# Altium PCB STM32F103C6T7A.PcbDoc
Units mil, origin at the board's own origin, x right, y up, seen from the top; angles counter-clockwise.
Board outline 2111.22 x 899.61 mil, 2 copper layers (Top Layer, Bottom Layer); 30 components, 49 nets, 163 pads, 161 vias.
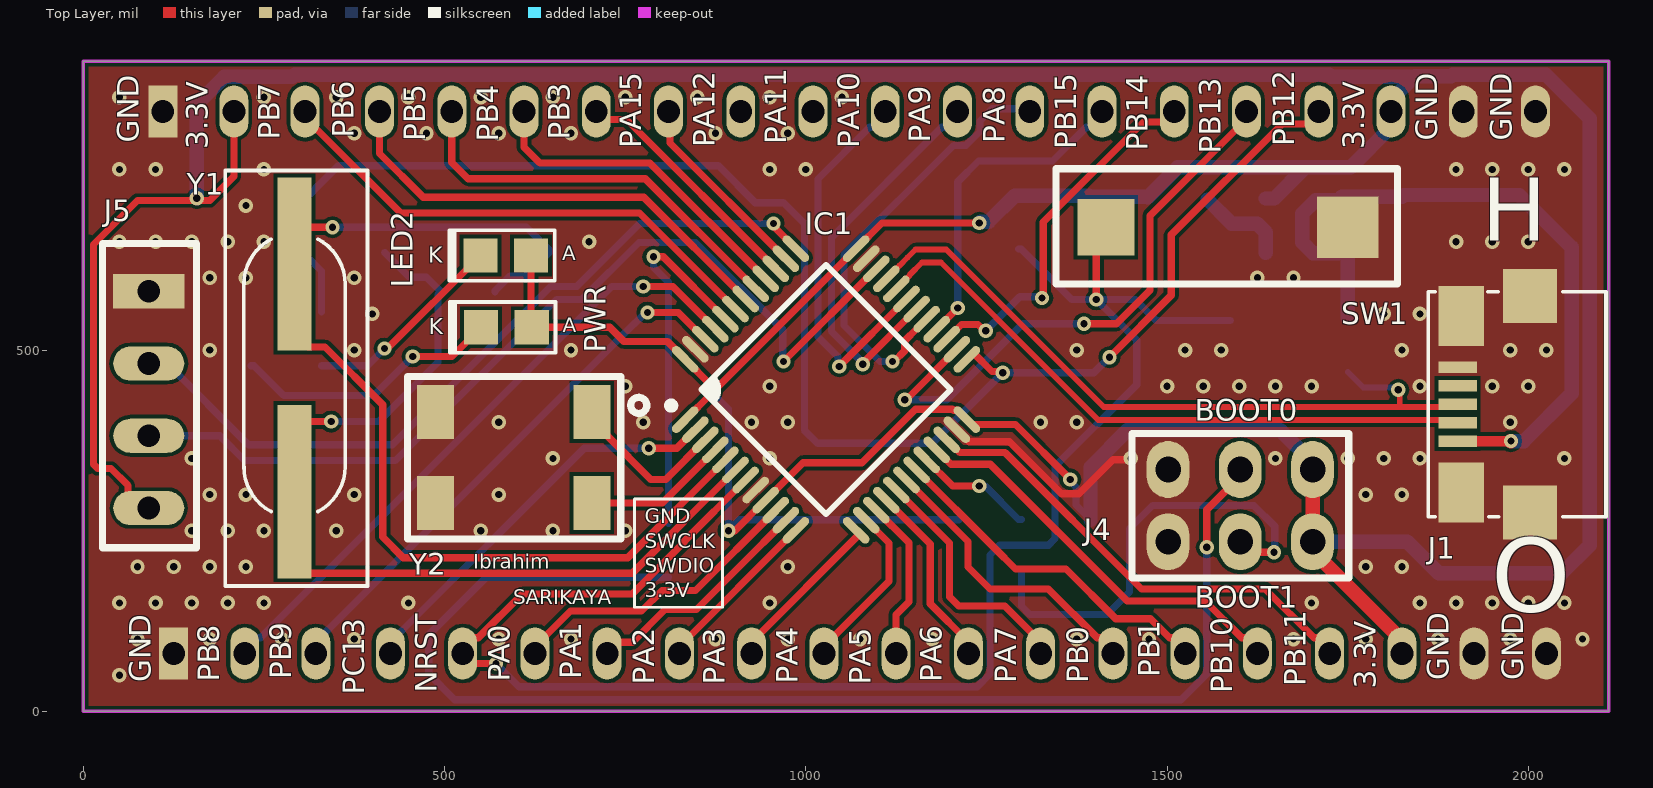
[diagram p0: Top Layer view]
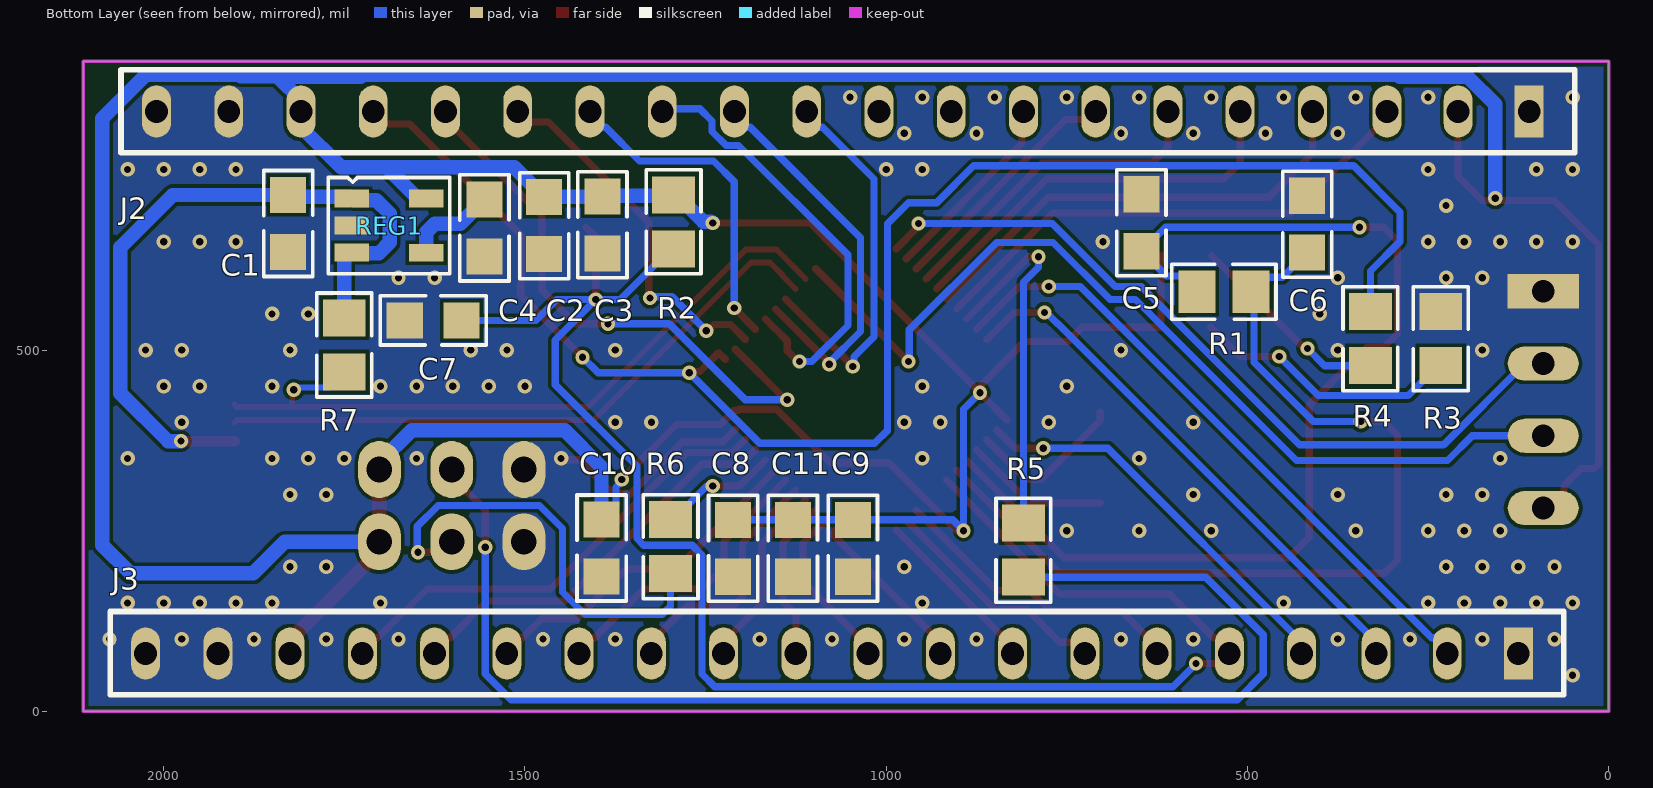
[diagram p1: Bottom Layer view, seen from below]
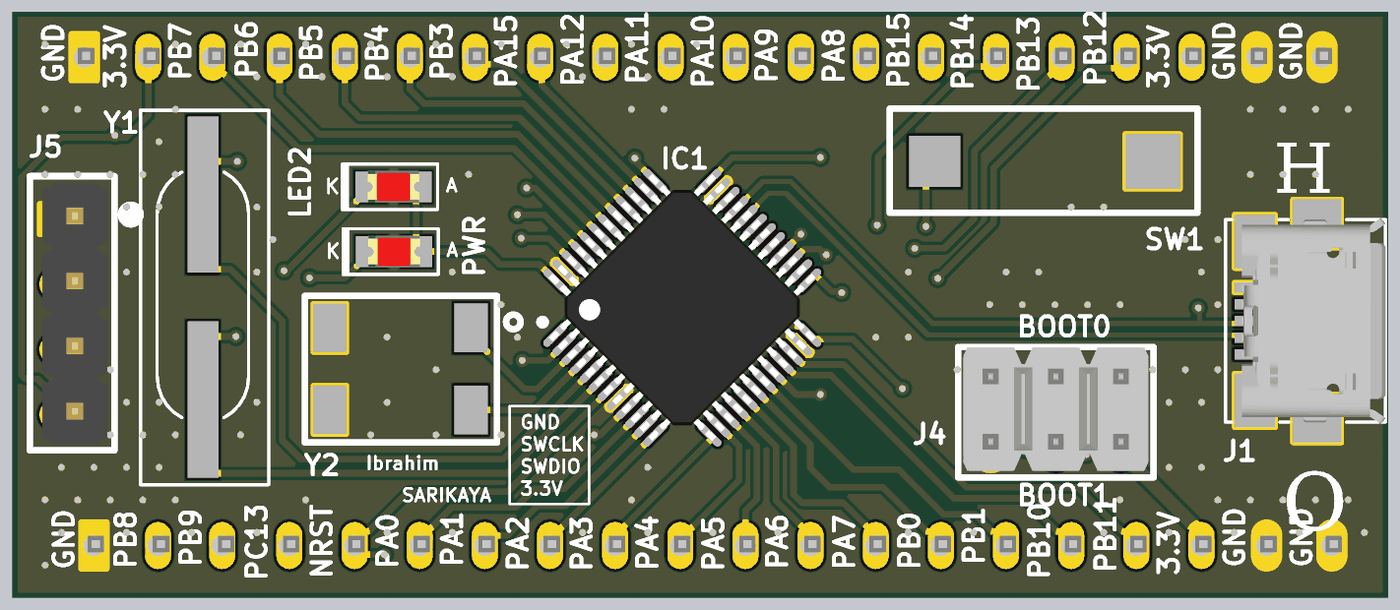
[diagram p2: 3D render of the assembled board from above, using the file's embedded part models]
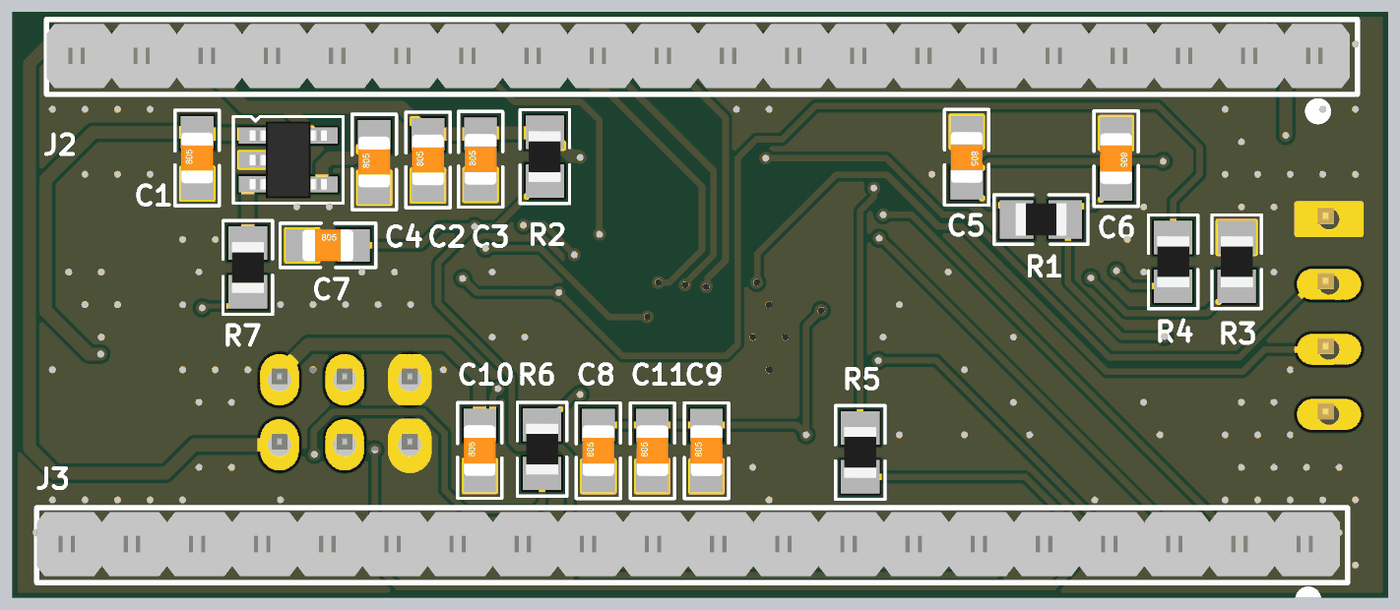
[diagram p3: 3D render of the assembled board from below, using the file's embedded part models]

## Layer stack, top to bottom
Top Solder: solder mask 0.4, Solder Resist, Dk 3.5
Top Layer: signal copper 1.4
Dielectric 1: dielectric 12.6, FR-4, Dk 4.8
Bottom Layer: signal copper 1.4
Bottom Solder: solder mask 0.4, Solder Resist, Dk 3.5

## Board outline
0,0 2111.22,0 2111.22,899.61 0,899.61

## Design rules (kind name [scope] priority, off if disabled: settings)
Clearance [All] p1: gap=5 ignorepadtopadclearanceinfootprint=TRUE
DiffPairsRouting DiffPair_90DiffPairsRouting [InDifferentialPairClass('diff_usb')] p1: maxlimit=10 minlimit=10 mostfreqgap=10 toplayer_minwidth=8 toplayer_maxwidth=8 toplayer_prefwidth=8 bottomlayer_minwidth=8 bottomlayer_maxwidth=8 bottomlayer_prefwidth=8 maxuncoupledlength=500
DiffPairsRouting [All] p2: maxlimit=10 minlimit=10 mostfreqgap=10 toplayer_minwidth=15 toplayer_maxwidth=15 toplayer_prefwidth=15 bottomlayer_minwidth=15 bottomlayer_maxwidth=15 bottomlayer_prefwidth=15 maxuncoupledlength=500
HoleSize [All] p1: absolutevalues=TRUE maxlimit=100 minlimit=0.1 maxpercent=80.000 minpercent=20.000
MatchedLengths DiffPair_90MatchedLengths [InDifferentialPairClass('diff_usb')] p1: tolerance=1000 checknetsindiffpair=FALSE checkdiffpairvsdiffpair=TRUE checkxsignals=TRUE checkothers=TRUE
PolygonConnect [All] p1: connectstyle=Direct reliefconductorwidth=10 reliefentries=4 polygonreliefangle="90 Angle" airgapwidth=10
RoutingVias [All] p1: holewidth=28 width=40 viastyle="Through Hole" minholewidth=7.87 minwidth=7.87 maxholewidth=28 maxwidth=50
SolderMaskExpansion [All] p1: expansion=4 istentingtop=FALSE
Width [All] p1: maxlimit=393.7 minlimit=7 preferedwidth=10
28 further rules are at their usual default settings.

## Classes and differential pairs
differential pair class diff_usb: USBD
differential pair USBD: +USBD_P -USBD_N

## Components (designator, comment, footprint, x,y, rotation, side; value= is the part's Value field where it differs from the comment)
C1 "0.1uF" CAP_0805 1827.76,675.2 r90 bottom
C2 "0.1uF" CAP_0805 1473.43,672.24 r90 bottom
C3 "1uF" CAP_0805 1392.72,673.23 r90 bottom
C4 "22pF" CAP_0805 1556,669 r90 bottom
C5 "22pF" CAP_0805 646.65,676.18 r270 bottom
C6 "22pF" CAP_0805 417.32,674.21 r270 bottom
C7 "0.1uF" CAP_0805 1627,541 r180 bottom
C8 "0.1uF" CAP_0805 1212,225.63 r90 bottom
C9 "0.1uF" CAP_0805 1045.99,225.63 r90 bottom
C10 "0.1uF" CAP_0805 1394,226 r90 bottom
C11 "0.1uF" CAP_0805 1129,225.63 r90 bottom
IC1 "STM32F103C6T7A" "ST LQFP-48 7X7MM" 1027.97,445.4 r45 top locked
J1 "MICRO USB2.0" CON_10118192-0001LF_SMD 1952.26,424.99 r90 top
J2 "20X1 Bergstrip" CON20_100_40D72_TH_ST 110,830 r270 bottom
J3 "20X1 Bergstrip" CON20_100_40D72_TH_ST 125,80 r270 bottom
J4 "2X3 Berg Strip" CON6_100_59D78_TH_ST_Duplicate 1701.38,334.65 r180 top
J5 "4X1 Bergstrip" CON4_100_40D72_TH_ST_MALE 90.55,581.3 r0 top
LED2 "RED LED" LED_0805 584.65,630.91 r0 top
PWR "RED LED" LED_0805 585.63,531.5 r0 top (schematic designator LED1)
R1 "10Mohm" RES_0805 532.48,580.71 r0 bottom
R2 "10K" RES_0805 1294.29,677.38 r270 bottom
R3 "1K" RES_0805 232.28,515.75 r90 bottom
R4 "1K" RES_0805 329.72,515.75 r90 bottom
R5 "10K" RES_0805 810,223 r270 bottom
R6 "10K" RES_0805 1298.44,227.96 r90 bottom
R7 "10K" RES_0805 1750,507 r90 bottom
REG1 "RT9193-33GB" SOT23-5 1687.99,672.24 r270 bottom
SW1 "TACT SWITCH" SW_342_SMD 1415.35,670 r180 top
Y1 "8MHz" XTAL_314_240X47_SMD 292.32,619.09 r270 top
Y2 "32.768KHz" "XTAL_MC-405 32.7680K-G3" 703.74,288.39 r180 top

## Footprints (in the part's own frame and the unit in brackets; to place one, negate y for a bottom-side part, rotate by r counter-clockwise, add the part's x,y. Pads: shape width x height; smd on the part's side, far side on the other; paste and mask are expansions set on the pad)
CAP_0805 [mil] "Ceramic Capacitor"
  rect 50x50 smd mask+3: 1(-39.37,0) 2(39.37,0)
  silkscreen extent -73,-34 73,34, body extent -39,-25 39,25, height 31
CON4_100_40D72_TH_ST_MALE [mm] "Berg Strip"
  rect 2.5x1.2 hole 0.8: 1(0,0)
  oval 2.5x1.2 hole 0.8: 2(0,-2.54) 3(0,-5.08) 4(0,-7.62)
  round 1.016 on Top Overlay: ""(2.311,0.178)
  silkscreen extent -1.63,-9.02 1.68,1.68, body extent -1.14,-8.76 1.4,1.4, height 8.55
CON6_100_59D78_TH_ST_Duplicate [mm] "Berg strip"
  oval 1.5x2 hole 0.9: 1(0,0) 2(0,2.54) 3(2.54,0) 4(2.54,2.54) 5(5.08,0) 6(5.08,2.54)
  silkscreen extent -1.27,-1.27 6.35,3.81, body extent -1.07,-1.27 6.15,3.56, height 8.18
CON20_100_40D72_TH_ST [mil] "Berg strip"
  rect 72x40 hole 31.5: 1(0,0)
  oval 72x40 hole 31.5: 2(0,-98.43) 3(0,-196.85) 4(0,-300) 5(0,-400) 6(0,-500) 7(0,-600) 8(0,-700) 9(0,-800) 10(0,-900) 11(0,-1000) 12(0,-1100) 13(0,-1200) 14(0,-1300) 15(0,-1400) 16(0,-1500) 17(0,-1600) 18(0,-1700) 19(0,-1800) 20(0,-1900)
  round 40 on Bottom Overlay: ""(83,2.57)
  silkscreen extent -58,-1949 57,63, body extent -51,-1949 47,51, height 323
CON_10118192-0001LF_SMD [mm] "USB2.0 MICRO"
  rect 0.4x1.35 smd: 1(-1.3,1.275) 2(-0.65,1.275) 3(0,1.275) 4(0.65,1.275) 5(1.3,1.275)
  rect 2.1x1.6 smd: 6(-3.1,1.15) 7(3.1,1.15)
  rect 1.9x1.9 smd: 8(-3.8,-1.275) 9(3.8,-1.275)
  silkscreen extent -3.95,-3.94 3.95,2.3, body extent -4.04,-3.94 4.04,1.66, height 2.81
LED_0805 [mm] "LED"
  rect 1.2x1.2 smd mask+0.076: A(0.889,0) K(-0.889,0)
  silkscreen extent -1.99,-0.89 1.73,0.89, body extent -1.01,-0.62 1.01,0.63, height 1.1
RES_0805 [mm] "Resister"
  rect 1.3x1.5 smd mask+0.076: 1(0.95,0) 2(-0.95,0)
  silkscreen extent -1.83,-0.97 1.83,0.97, body extent -1,-0.63 1,0.62, height 0.5
SOT23-5 [mm] "CASE: SOT"
  rect 0.62x1.22 smd mask+0.076: 1(-0.953,-1.31) 2(-0.003,-1.31) 3(0.947,-1.31) 4(0.952,1.31) 5(-0.953,1.31)
  silkscreen extent -1.69,-2.14 1.69,2.14, body extent -1.5,-1.5 1.5,1.5, height 1.41
"ST LQFP-48 7X7MM" [mm] "LQFP, 48-Leads, Body 7.00x7.00mm, Pitch 0.50mm, IPC Medium Density"
  oval 1.2x0.3 smd: 1(-4.25,2.75) 2(-4.25,2.25) 3(-4.25,1.75) 4(-4.25,1.25) 5(-4.25,0.75) 6(-4.25,0.25) 7(-4.25,-0.25) 8(-4.25,-0.75) 9(-4.25,-1.25) 10(-4.25,-1.75) 11(-4.25,-2.25) 12(-4.25,-2.75) 25(4.25,-2.75) 26(4.25,-2.25) 27(4.25,-1.75) 28(4.25,-1.25) 29(4.25,-0.75) 30(4.25,-0.25) 31(4.25,0.25) 32(4.25,0.75) 33(4.25,1.25) 34(4.25,1.75) 35(4.25,2.25) 36(4.25,2.75)
  oval 0.3x1.2 smd: 13(-2.75,-4.25) 14(-2.25,-4.25) 15(-1.75,-4.25) 16(-1.25,-4.25) 17(-0.75,-4.25) 18(-0.25,-4.25) 19(0.25,-4.25) 20(0.75,-4.25) 21(1.25,-4.25) 22(1.75,-4.25) 23(2.25,-4.25) 24(2.75,-4.25) 37(2.75,4.25) 38(2.25,4.25) 39(1.75,4.25) 40(1.25,4.25) 41(0.75,4.25) 42(0.25,4.25) 43(-0.25,4.25) 44(-0.75,4.25) 45(-1.25,4.25) 46(-1.75,4.25) 47(-2.25,4.25) 48(-2.75,4.25)
  silkscreen extent -4.37,-3.1 3.1,3.57, body extent -4.51,-4.51 4.51,4.51, height 1.55
SW_342_SMD [mm] "CASE: SMD"
  rect 2x2 smd: 1(0,0)
  rect 2.15x2.15 smd: 2(-8.5,0)
  silkscreen extent -10.25,-2.06 1.75,2, body extent -7.17,-1.79 -1.17,1.71, height 2.4
XTAL_314_240X47_SMD [mm] "CASE: TH"
  rect 6.096x1.2 smd: 1(0,0) 2(8,0)
  silkscreen extent -3.29,-2.44 11.32,2.57, body extent -2.99,-2.27 10.9,2.41, height 3.05
"XTAL_MC-405 32.7680K-G3" [mm] "Crystal"
  rect 1.3x1.9 smd: 1(0,-3.2) 2(5.5,-3.2) 3(5.5,0) 4(0,0)
  silkscreen extent -1.93,-4.44 6.48,1.27, body extent -1.02,-4.44 6.48,1.27, height 3.6

## Part data
C1 C2 C7 C8 C9 C10 C11: library part CAP_0.1uF-50V-5%-0805, "0.1µF ±5% 50V Ceramic Capacitor X7R 0805 (2012 Metric)", Case/Package="0805 (2012 Metric)", Manufacturer=KEMET, Manufacturing Part Number=C0805C104J5RACTU, Supplier Part Number-1=399-1171-1-ND, Supplier-1=Digikey
C3: library part CAP_1uF-50V-5%-0805, "1µF ±5% 50V Ceramic Capacitor X7R 0805 (2012 Metric)", Case/Package="0805 (2012 Metric)", Manufacturer=Yageo, Manufacturing Part Number=CC0805JKX7R9BB105, Supplier Part Number-1=311-3498-1-ND, Supplier-1=Digikey
C4 C5 C6: library part CAP_22pF-50V-5%-0805, "22pF ±5% 50V Ceramic Capacitor C0G, NP0 0805 (2012 Metric)", Case/Package=0805, Manufacturer=KEMET, Manufacturer Part Number=C0805C220J5GACTU, Supplier Part Number-1=399-1113-1-ND, Supplier-1=Digikey
IC1: "IC MCU 32BIT 32KB FLASH 48LQFP", Device Package=48-LQFP, Manufacturer=STMicroelectronics, Operating Temperature="-40°C ~ 105°C (TA)", Supplier Device Package="48-LQFP (7x7)", Supplier Part Number 1=497-11516-ND, Voltage - Supply (Vcc/Vdd)="2V ~ 3.6V", ComponentLink1Description=Datasheet, ComponentLink1URL=http://www.st.com/content/ccc/resource/technical/document/datasheet/0d/93/e0/d7/77/bf/4c/54/CD00210843.pdf/files/CD00210843.pdf/jcr:content/translations/en.CD00210843.pdf, ComponentLink2Description="DigiKey Link", ComponentLink2URL=//digikey.com/product-detail/en/stmicroelectronics/STM32F103C6T7A/497-11516-ND/2035348, Connectivity="CANbus, I²C, IrDA, LINbus, SPI, UART/USART, USB", Core Processor="ARM® Cortex®-M3", Core Size=32-Bit, Data Converters="A/D 10x12b", LastUpdated="4.12.2019 05:20:26", Lifecycle Status=0, Minimum Order=1, Mounting Type="Surface Mount", Number of I/O=37, Oscillator Type=Internal, Package / Case=48-LQFP, Packaging=Tray, Part Number=STM32F103C6T7A, Part Status=Active, PartId=102, Peripherals="DMA, Motor Control PWM, PDR, POR, PVD, PWM, Temp Sensor, WDT", Price=4.52, Program Memory Size="32KB (32K x 8)", Program Memory Type=FLASH, RAM Size="10K x 8", Series=STM32F1, Speed=72MHz, Supplier 1=DigiKey
J1: library part CON-USB_10118192-0002LF-SMD, "USB - micro B USB 2.0 Receptacle Connector 5 Position Surface Mount, Right Angle", Case/Package=SMD, Manufacturer="Amphenol ICC (FCI)", Manufacturing Part Number=10118192-0002LF, Supplier Part Number-1=609-5379-1-ND, Supplier-1=Digikey
J2 J3: library part CON-BS-PLG_20X1-100-TH-ST, "20 pin, 1 row, 2.54mm pitch bergstrip", Case/Package=TH, Manufacturer=NA, Manufacturing Part Number=NA, Supplier Part Number-1=NA, Supplier-1=NA
J4: library part CON-BS-PLG_2X3-100-TH-ST, "6 pin, 2 row, 2.54mm pitch bergstrip", Case/Package=TH, Manufacturer=NA, Manufacturer Part Number=NA, Supplier Part Number-1=NA, Supplier-1=NA
J5: library part CON-BS-PLG_4X1-100-TH-ST, "4 pin, 1 row, 2.54mm pitch bergstrip", Case/Package=TH, Manufacturer=NA, Manufacturing Part Number=NA, Supplier Part Number-1=NA, Supplier-1=NA
LED2 PWR: library part LED-RED_10mA-0805, "Red 621nm LED Indication - Discrete 2V 0805 (2012 Metric)", Case/ Package=0805, Manufacturer="Lite-On Inc.", Manufacturer Part Number=LTST-C170EKT, Supplier Part Number-1=160-1178-1-ND, Supplier-1=Digikey
R1: library part RES_10MOHM-0.125W-1%-0805, "10 MOhms ±1% 0.125W, 1/8W Chip Resistor 0805 (2012 Metric) Automotive AEC-Q200, High Voltage Thick Film", Case/Package="0805 (2012 Metric)", Manufacturer="Rohm Semiconductor", Manufacturing Part Number=KTR10EZPF1005, Supplier Part Number-1=RHM10.0MAHCT-ND, Supplier-1=Digikey
R2 R5 R6 R7: library part RES_10K-0.125W-1%-0805, "10 kOhms ±1% 0.125W, 1/8W Chip Resistor 0805 (2012 Metric) Moisture Resistant Thick Film", Case/Package=0805, Manufacturer=Yageo, Manufacturing Part Number=RC0805FR-0710KL, Supplier Part Number-1=311-10.0KCRCT-ND, Supplier-1=Digikey
R3 R4: library part RES_1K-0.125W-1%-0805, "1 kOhms ±1% 0.125W, 1/8W Chip Resistor 0805 (2012 Metric) Moisture Resistant Thick Film", Case/Package=0805, Manufacturer=垈㎵á, Manufacturer Part Number=RC0805FR-071KL, Supplier Part Number-1=311-1.00KCRCT-ND, Supplier-1=Digikey
REG1: library part REG_3.3V-5.5V-0.3A-SOT-23-5, "Linear Voltage Regulator IC 1 Output 300mA SOT-23-5", Case/ Package=SOT-23-5, Manufacturer="Richtek USA Inc.", Supplier Part Number-1=1028-1014-1-ND, Manufacturer Part Number=RT9193-33GB, Supplier-1=Digikey
SW1: library part SW_KSR223GLFG-SMD, "Tactile Switch SPST-NO Top Actuated Surface Mount", Case/Package=SMD, Manufacturer=C&K, Manufacturing Part Number=KSR223GLFG, Supplier Part Number-1=401-1704-1-ND, Supplier-1=Digikey
Y1: library part XTAL_8MHZ-LFXTAL030234, "Crystals 8MHz 22pF -20C 70C", Case/Package=SMD, Manufacturer="IQD Frequency Products", Manufacturing Part Number=LFXTAL030234Reel, Supplier Part Number-1=449-LFXTAL030234REEL, Supplier-1=Mouser
Y2: library part "XTAL_32.768KHz-MC-405 32.7680K-G3", "Crystals SMD AT XTL MHZ +/-50PPM 12.5 PF 250 T/R", Case/Package=SMD, Manufacturer=Epson, Manufacturing Part Number="MC-405 32.7680K-G3: ROHS", Supplier Part Number-1=732-MC405327680KG3RS, Supplier-1=Mouser

## Via types
v1: diameter 20, hole 10, Top Layer to Bottom Layer, tented top, 129 vias
v2: diameter 19.68, hole 10, Top Layer to Bottom Layer, tented top, 32 vias

## Nets (pads, with @x,y where several pads share a name; then routed paths per layer and width w, separated by ;. In a path a pad name is that pad's centre, name@x,y a point inside that pad or via, vN(x,y) a via of type N, cw(c..) or ccw(c..) an arc to the next point about the centre after c; other vN are vias at no path point)
3.3V: C2.2 C3.2 C8.2 C9.2 C10.2 C11.2 IC1.1 IC1.9 IC1.24 IC1.36 IC1.48 J2.2 J2.18 J3.18 J4.1 J4.2 J5.4 LED2.A PWR.A R2.2 REG1.5 | length 7439
  Top Layer w10: J5.4 78.94,281.3 61.73,298.5 61.73,312.69 38.43,336 19.86,336 14,341.86 14,646 75,707 175,707 208.43,740.43 J2.2 ; LED2.A 619.65,532.48 PWR.A 728.51,531.49 748,512 808.26,512 IC1.48 868.15,452.11 ; IC1.1 v2@870,440.55 ; v2@871.63,442.4 1069.5,640.27 IC1.36 1105.45,676 v2(1240,676) ; v2(893,250) 902,250 944.29,292.29 IC1.9 996.16,344 1077.77,344 1151.93,418.16 1202.98,418.16 1204.62,416.52 1209.97,416.52 IC1.24 1229.58,396.91 1290.09,396.91 v2(1366,321)
  Top Layer w20: J4.1 J4.2 1701.38,222.21 1825,98.59 J3.18
  Bottom Layer w10: v2(870,441) 893,418 v2(893,250) 908,265 C9.2 C11.2 C8.2 ; v2(1366,321) 1366,318.38 1374,310.38 1374,285.37 C10.2
  Bottom Layer w20: v2(157,710) 157,840 195,878 289.35,878 292.35,881 1724.5,881 1727.5,878 1842,878 ; v2(1240,676) 1241.85,677.85 1253.43,677.85 1289.26,713.69 1295.38,713.69 1391.63,713.69 C3.2 1393.21,712.11 1472.94,712.11 C2.2 1514.81,753 1691.48,753 ; C10.2 1394,338 1445.02,389.02 1656.85,389.02 1701.38,344.49 J4.1 ; REG1.5 1648.23,709.75 1691.48,753 ; J4.2 1832.35,234.65 1876,191 2046,191 2085,230 2085,820.5 2024.5,881 1895.5,881 1893.5,879 1843,879 1810,846 J2.18 1810,808.72 1754.28,753 1691.48,753
5V: C1.2 J1.1 R7.1 REG1.1 REG1.3 | length 999.5
  Top Layer w15: J1.1 v2@1975.65,373.81
  Top Layer w20: v2@1975.65,373.81 v2(1975.87,374.03)
  Bottom Layer w20: R7.1@1749.7,544.7 R7.1 1750,632.74 1748.74,634 1702,634 1687,649 1687,689 1705.54,707.54 1737.37,707.54 REG1.1 1741.77,711.95 1825.14,711.95 C1.2 1987.43,714.57 2060,642 2060,440 1994.03,374.03 v2(1975.87,374.03)
BOOT0: J4.3 R5.1 | length 1828
  Top Layer w10: v2(1555,227) 1555,279 1601.38,325.38 J4.3
  Bottom Layer w10: R5.1 557.6,185.6 478,106 478,51.86 513.86,16 1519.43,16 1555,51.57 v2(1555,227)
BOOT1: J4.4 R6.2 | length 615.6
  Top Layer w10: J4.4 1616.02,220 v2(1648,220)
  Bottom Layer w10: R6.2 1298.44,145.56 1310,134 1417,134 1448,165 1448,253 1480,285 1620,285 1649,256 1649,221 v2(1648,220)
GND: C1.1 C2.1 C3.1 C4.1 C5.1 C6.1 C7.1 C8.1 C9.1 C10.1 C11.1 IC1.8 IC1.23 IC1.35 IC1.47 J1.5 J1.6 J1.7 J1.8 J1.9 J2.1 J2.19 J2.20 J3.1 J3.19 J3.20 J4.5 J4.6 J5.1 R3.1 REG1.2 SW1.2 Y2.2 Y2.3 | length 298
  Top Layer w10: IC1.23 1209.41,389.73 1225.94,373.2 1281.88,373.2 1353.91,301.16 1378.12,301.16 1425.05,348.09 1448.09,348.09 v1(1450,350)
  other v1: 50,50 75,100 175,100 275,100 375,100 575,100 675,100 875,100 975,100 1075,100 1175,100 1375,100 1475,100 1675,100 1775,100 1875,100 1975,100 2075,100 50,150 100,150 150,150 200,150 250,150 450,150 950,150 1700,150 1850,150 1900,150 1950,150 2000,150 2050,150 75,200 125,200 175,200 225,200 975,200 1775,200 1825,200 150,250 200,250 250,250 350,250 550,250 650,250 750,250 175,300 225,300 375,300 575,300 1775,300 1825,300 150,350 650,350 950,350 1650,350 1750,350 1800,350 1850,350 2050,350 575,400 775,400 925,400 975,400 1325,400 1375,400 1975,400 750,450 950,450 1500,450 1550,450 1600,450 1650,450 1700,450 1850,450 1950,450 2000,450 175,500 375,500 675,500 1375,500 1525,500 1575,500 1825,500 1975,500 2025,500 400,550 1800,550 1850,550 175,600 225,600 375,600 1625,600 1675,600 50,650 100,650 150,650 200,650 250,650 700,650 1900,650 1950,650 2000,650 225,700 50,750 100,750 250,750 950,750 1000,750 1900,750 1950,750 2000,750 2050,750 375,800 475,800 575,800 675,800 875,800 975,800 50,850 250,850 350,850 450,850 550,850 650,850 750,850 850,850 950,850 1050,850
NetC4_2: C4.2 REG1.4 | length 127.6
  Bottom Layer w20: C4.2 1589.38,675 1624.7,675 1636.42,663.28 REG1.4
NetLED1_K: PWR.K R3.2 | length 374.6
  Top Layer w10: v2(456,491) 510.14,491 PWR.K
  Bottom Layer w10: R3.2 236.22,478.35 277.57,437 402,437 421,456 v2(456,491)
NetLED2_K: LED2.K R4.2 | length 283.1
  Top Layer w10: v2(417,502) 420.74,502 LED2.K
  Bottom Layer w10: R4.2 393.35,478.35 v2(417,502)
NetR5_2: IC1.44 R5.2 | length 512.8
  Top Layer w10: v2(789,629) 802.61,629 IC1.44
  Bottom Layer w10: v2(789,629) 789,614.85 810,593.86 R5.2
NetR6_1: IC1.20 R6.1 | length 165.5
  Top Layer w10: IC1.20 1203.13,312 v2(1240,312)
  Bottom Layer w10: v2(1240,312) 1247.87,312 1294.5,265.37 R6.1
NRST: C7.2 IC1.7 J3.5 R2.1 SW1.1 | length 2365.2
  Top Layer w10: v2(571,66) 526,66 525,67 J3.5 525,87.88 538.86,101.74 546.74,101.74 607.4,162.4 759.84,162.4 831.79,234.35 831.79,235.31 IC1.7 ; v2(1402,570) 1402,656.65 SW1.1
  Bottom Layer w10: v2(571,66) 603,34 1237.43,34 1255,51.57 1255,216.38 1268.39,229.77 1335.77,229.77 1345,239 1345,339 1458,452 1458,514 v2(1402,570) ; R2.1 1298.22,639.97 1368.2,570 v2(1402,570) ; C7.2 1484.91,541 1455.91,570 v2(1402,570)
PA0: IC1.10 J3.6 | length 421.1
  Top Layer w10: J3.6 625,89.57 674.21,138.78 772.64,138.78 801.18,167.32 847.32,167.32 IC1.10
PA1: IC1.11 J3.7 | length 324.7
  Top Layer w10: J3.7 725,81.77 738.86,95.63 760,95.63 805.12,140.75 848.59,140.75 908.84,201 IC1.11
PA2: IC1.12 J3.8 | length 237.6
  Top Layer w10: J3.8 825,89.81 985.72,250.53 IC1.12
PA3: IC1.13 J3.9 | length 234
  Top Layer w10: J3.9 925,96 1074.04,245.04 1074.04,246.22 IC1.13
PA4: IC1.14 J3.10 | length 234.8
  Top Layer w10: J3.10 1025,89.96 1115.16,180.12 1115.16,232.94 IC1.14
PA5: IC1.15 J3.11 | length 224.4
  Top Layer w10: IC1.15 1142.72,233.22 1142.72,151.57 1125,133.86 J3.11
PA6: IC1.16 J3.12 | length 259.3
  Top Layer w10: IC1.16 1172.24,231.53 1172.24,148.76 1225,96 J3.12
PA7: IC1.17 J3.13 | length 346.2
  Top Layer w10: IC1.17 1198.82,232.79 1198.82,158.46 1211.61,145.67 1275.33,145.67 1325,96 J3.13
PA8: IC1.29 J2.13 | length 643.6
  Top Layer w10: v2(1120,484) 1122,484 1137,499 1137,513 1153.97,529.96 1154.29,529.96 IC1.29
  Bottom Layer w10: v2(1120,484) 1119.93,484.07 1102.93,484.07 1053,534 1053,631.74 1204.26,783 1221.43,783 1241,802.57 1241,817 1258,834 1306,834 J2.13 1310,822.12 J2.13@1296.14,808.26
PA9: IC1.30 J2.12 | length 552
  Top Layer w10: v2(1078.68,480.26) 1078.68,482.2 IC1.30
  Bottom Layer w10: v2(1078.68,480.26) 1078.68,482.34 1035.43,525.59 1035.43,655.43 1188.26,808.26 1196.14,808.26 1210,822.12 J2.12
PA10: IC1.31 J2.11 | length 540
  Top Layer w10: v2(1046.26,477.36) 1046.26,477.62 IC1.31
  Bottom Layer w10: v2(1046.26,477.36) 1044.41,479.22 1044.41,490.57 1016.73,518.24 1016.73,736.73 1088.26,808.26 1096.14,808.26 1110,822.12 J2.11
PA11: J2.10
PA12: J2.9
PA15: IC1.38 J2.8 | length 270.9
  Top Layer w10: J2.8 812.07,827.93 812.07,786.57 IC1.38
PB0: IC1.18 J3.14 | length 410.4
  Top Layer w10: IC1.18 1224.41,235.04 1224.41,199.8 1254.92,169.29 1335.71,169.29 1403.26,101.74 1411.14,101.74 1425,87.88 J3.14
PB1: IC1.19 J3.15 | length 481.7
  Top Layer w10: IC1.19 1260.83,226.46 1260.83,226.38 1290.35,196.85 1360.24,196.85 1429.09,128 1477,128 1503.26,101.74 1511.14,101.74 1525,87.88 J3.15
PB3: IC1.39 J2.7 | length 338.5
  Top Layer w10: J2.7 721,819 751.81,819 IC1.39
PB4: IC1.40 J2.6 | length 459.2
  Top Layer w10: J2.6 610,780.75 631.89,758.86 784.11,758.86 IC1.40
PB5: IC1.41 J2.5 | length 563.4
  Top Layer w10: J2.5 510,759.68 532.48,737.2 777.92,737.2 IC1.41
PB6: IC1.42 J2.4 | length 648
  Top Layer w10: J2.4 410,772.09 470.47,711.61 775.68,711.61 IC1.42
PB7: IC1.43 J2.3 | length 713.6
  Top Layer w10: J2.3 306.85,822.12 325.66,803.31 439.24,689.73 769.72,689.73 IC1.43
PB8: IC1.45 J3.2 | length 894.7
  Top Layer w10: v2(775,588) 815.77,588 IC1.45
  Bottom Layer w10: J3.2 223.43,87.88 237.28,101.74 245.17,101.74 731.43,588 v2(775,588) v2@775,584.25
PB9: IC1.46 J3.3 | length 759.3
  Top Layer w10: v2(781,552) 823.44,552 860.44,515 IC1.46
  Bottom Layer w10: J3.3 321.85,96 762.27,536.42 762.8,536.42 778.38,552 v2(781,552)
PB10: IC1.21 J3.16 | length 565.3
  Top Layer w10: IC1.21 1200.97,342 1255.44,342 1444.88,152.56 1552.44,152.56 1603.26,101.74 1611.14,101.74 1625,87.88 J3.16
PB11: IC1.22 J3.17 | length 657.1
  Top Layer w10: IC1.22 1195.49,375.81 1213.3,358 1275.86,358 1464.57,169.29 1635.71,169.29 1703.26,101.74 1711.14,101.74 1725,87.88 J3.17
PB12: IC1.25 J2.17 R4.1 | length 2234.4
  Top Layer w10: IC1.25 1231.24,495.56 1232.42,495.56 1257.63,470.36 1270.78,470.36 v2(1272.64,468.5) ; v2(1420.28,490.16) 1505.91,575.79 1505.91,659.45 1659.45,812.99 1696.14,812.99 1710,826.85 J2.17
  Bottom Layer w10: R4.1 329.73,609.27 289,650 289,691 353,755 879,755 930,704 969.14,704 998,675.14 998,389 1016,371 1175.13,371 v2(1272.64,468.5) 1398.62,468.5 v2(1420.28,490.16)
PB13: IC1.26 J2.16 | length 805.5
  Top Layer w10: v2@1137.88,430.04 IC1.26 ; v2(1384.84,536.42) 1430.12,536.42 1476.38,582.68 1476.38,686.02 1610,819.65 J2.16
  Bottom Layer w10: v2(1136.81,431.1) 1195.1,431.1 1300.42,536.42 v2(1384.84,536.42)
PB14: IC1.27 J2.15 | length 515
  Top Layer w10: IC1.27 1215.43,535.43 1238.32,535.43 1247.17,526.57 v2(1249.02,526.57) ; v2(1327.02,572.1) 1328.74,573.82 1328.74,677.17 1467.31,815.74 1496.14,815.74 1510,829.6 J2.15
  Bottom Layer w10: v2(1249.02,526.57) 1296.26,573.82 1325.31,573.82 v2(1327.02,572.1)
PB15: IC1.28 J2.14 | length 460.6
  Top Layer w10: IC1.28 v2(1210.23,558.07)
  Bottom Layer w10: v2(1210.23,558.07) 1210.23,732.87 1238.88,761.51 1341.51,761.51 1388.26,808.26 1396.14,808.26 1410,822.12 J2.14
PC13: IC1.2 J3.4 | length 560.7
  Top Layer w10: v2(782.48,364.17) 821.46,364.17 IC1.2
  Bottom Layer w10: J3.4 425,96 693.17,364.17 v2(782.48,364.17) v2@783.46,364.17
SWCLK: IC1.37 J5.2 | length 1085.5
  Top Layer w10: v2(955.16,675) 957.01,673.15 957.01,669.47 IC1.37
  Bottom Layer w10: J5.2 116.14,481.3 228.44,369 428,369 647,588 683,588 770,675 v2(955.16,675)
SWDIO: IC1.34 J5.3 | length 1294.6
  Top Layer w10: v2(969,484) 969.13,484 IC1.34
  Bottom Layer w10: J5.3 188.7,381.3 223,347 432,347 655,570 690,570 769,649 847,649 968,528 v2@968,482
USBD_N: IC1.32 J1.2 | length 884.3
  Top Layer w8: IC1.32 1143.92,603.11 1143.92,604.3 1160.68,621.06 1187.01,621.06 1337.6,470.47 1404.88,403.2 1869.61,403.2 1869.69,403.12 1898.35,403.12 J1.2
USBD_P: IC1.33 J1.3 R7.2 | length 1005
  Top Layer w8: IC1.33 1125.1,612.13 1125.1,612.44 1129.69,617.03 1129.87,617.03 1140.89,628.05 1151.91,639.06 1194.46,639.06 1355.6,477.93 1412.33,421.2 1824,421.2 ; v2(1820,445) 1822.04,442.96 1822.04,423.16 1824,421.2 ; J1.3 1898.35,421.27 1869.69,421.27 1869.61,421.2 1824,421.2
  Bottom Layer w8: R7.2 1771.59,448.01 1813.83,448.01 1816.84,445 v2(1820,445)
XTALA: C5.2 IC1.5 R1.1 Y1.1 | length 1493.5
  Top Layer w10: v2(345,670) 310.94,670 292.32,651.38 Y1.1 292.32,522.72 310.94,504.09 334.49,504.09 414.37,424.21 414.37,241.14 442.91,212.6 753.4,212.6 IC1.5
  Bottom Layer w10: v2(345,670) 613.46,670 C5.2 612.51,602.67 590.48,602.67 569.89,582.08 R1.1
XTALB: C6.2 IC1.6 R1.2 Y1.2 | length 1290.1
  Top Layer w10: v2(343,401) 310.94,401 292.32,382.38 Y1.2 292.32,209.57 310.94,190.94 759.59,190.94 IC1.6
  Bottom Layer w10: v2(343,401) 409,401 491,483 491,576.62 R1.2 475.09,600.7 451.46,600.7 C6.2
XTALC: IC1.3 Y2.1 | length 225.6
  Top Layer w10: Y2.1 703.74,402.56 724.33,381.97 785.43,320.87 805.99,320.87 IC1.3
XTALD: IC1.4 Y2.4 | length 201.6
  Top Layer w10: Y2.4 801.35,288.39 IC1.4
pads on no net: J1.4 J2. J3. J5.

## Polygon pours and split planes (outlines as drawn)
GND on Top Layer " " (solid, remove dead copper, pour order 1): 0,899.61 0,0 2111.22,0 2111.22,899.61
GND on Bottom Layer " " (solid, remove dead copper, pour order 2): 0,899.61 0,0 2111.22,0 2111.22,899.61

## Keep-outs
Keep-Out Layer:
  the board outline again, w5

## Silkscreen, mask and mechanical layers (free items; w line width, h text height)
Top Overlay:
  lines w3.94: 763,144 884.79,144 884.79,294 763,294 763,144
  text "PB6" at 374,794 h30 r90
  text "PB7" at 272,791 h30 r90
  text "PB3" at 673,791 h30 r90
  text "GND" at 1874,790 h30 r90
  text "GND" at 1977,790 h30 r90
  text "PB5" at 473,789 h30 r90
  text "PB4" at 574,788 h30 r90
  text "GND" at 77,787 h30 r90
  text "PA9" at 1172,787 h30 r90
  text "PA8" at 1275,786 h30 r90
  text "PA11" at 973,785 h30 r90
  text "PB12" at 1676,782 h30 r90
  text "PA12" at 874,781 h30 r90
  text "PA15" at 772,779 h30 r90
  text "PA10" at 1074,779 h30 r90
  text "3.3V" at 172,778 h30 r90
  text "PB15" at 1374,778 h30 r90
  text "3.3V" at 1773,778 h30 r90
  text "PB14" at 1473,776 h30 r90
  text "PB13" at 1574,772 h30 r90
  text "H" at 1935.41,622.02 h150
  text "BOOT0" at 1538,402 h30
  text "GND" at 777,260 h20
  text "SWCLK" at 777,226 h20
  text "Ibrahim" at 540,197 h20
  text "SWDIO" at 777,192 h20
  text "3.3V" at 777,158 h20
  text "SARIKAYA" at 595,148 h20
  text "BOOT1" at 1538,143 h30
  text "O" at 1948.83,103.72 h175
  text "PB1" at 1490,47 h30 r90
  text "PB9" at 288,44 h30 r90
  text "PA1" at 689,44 h30 r90
  text "GND" at 1890,43 h30 r90
  text "GND" at 1993,43 h30 r90
  text "PB8" at 188,41 h30 r90
  text "PA0" at 590,41 h30 r90
  text "GND" at 93,40 h30 r90
  text "PA6" at 1188,40 h30 r90
  text "PA7" at 1291,39 h30 r90
  text "PB0" at 1391,39 h30 r90
  text "PA4" at 989,38 h30 r90
  text "PA2" at 790,37 h30 r90
  text "PA3" at 888,37 h30 r90
  text "PA5" at 1090,37 h30 r90
  text "PB11" at 1692,35 h30 r90
  text "3.3V" at 1789,31 h30 r90
  text "NRST" at 489,26 h30 r90
  text "PB10" at 1590,25 h30 r90
  text "PC13" at 389,23 h30 r90

## Text inside footprints (layer, text, board x,y; h text height)
LED2: Top Overlay "K" at 477.36,621.06 h22; Top Overlay "A" at 662.89,624.01 h20
PWR: Top Overlay "K" at 478.35,521.65 h22; Top Overlay "A" at 663.88,524.6 h20